# Altium PCB nRF51822.PcbDoc
Units mil, origin at the board's own origin, x right, y up, seen from the top; angles counter-clockwise.
Board outline 1575 x 1405 mil, 2 copper layers (Top Layer, Bottom Layer); 36 components, 48 nets, 160 pads, 68 vias.
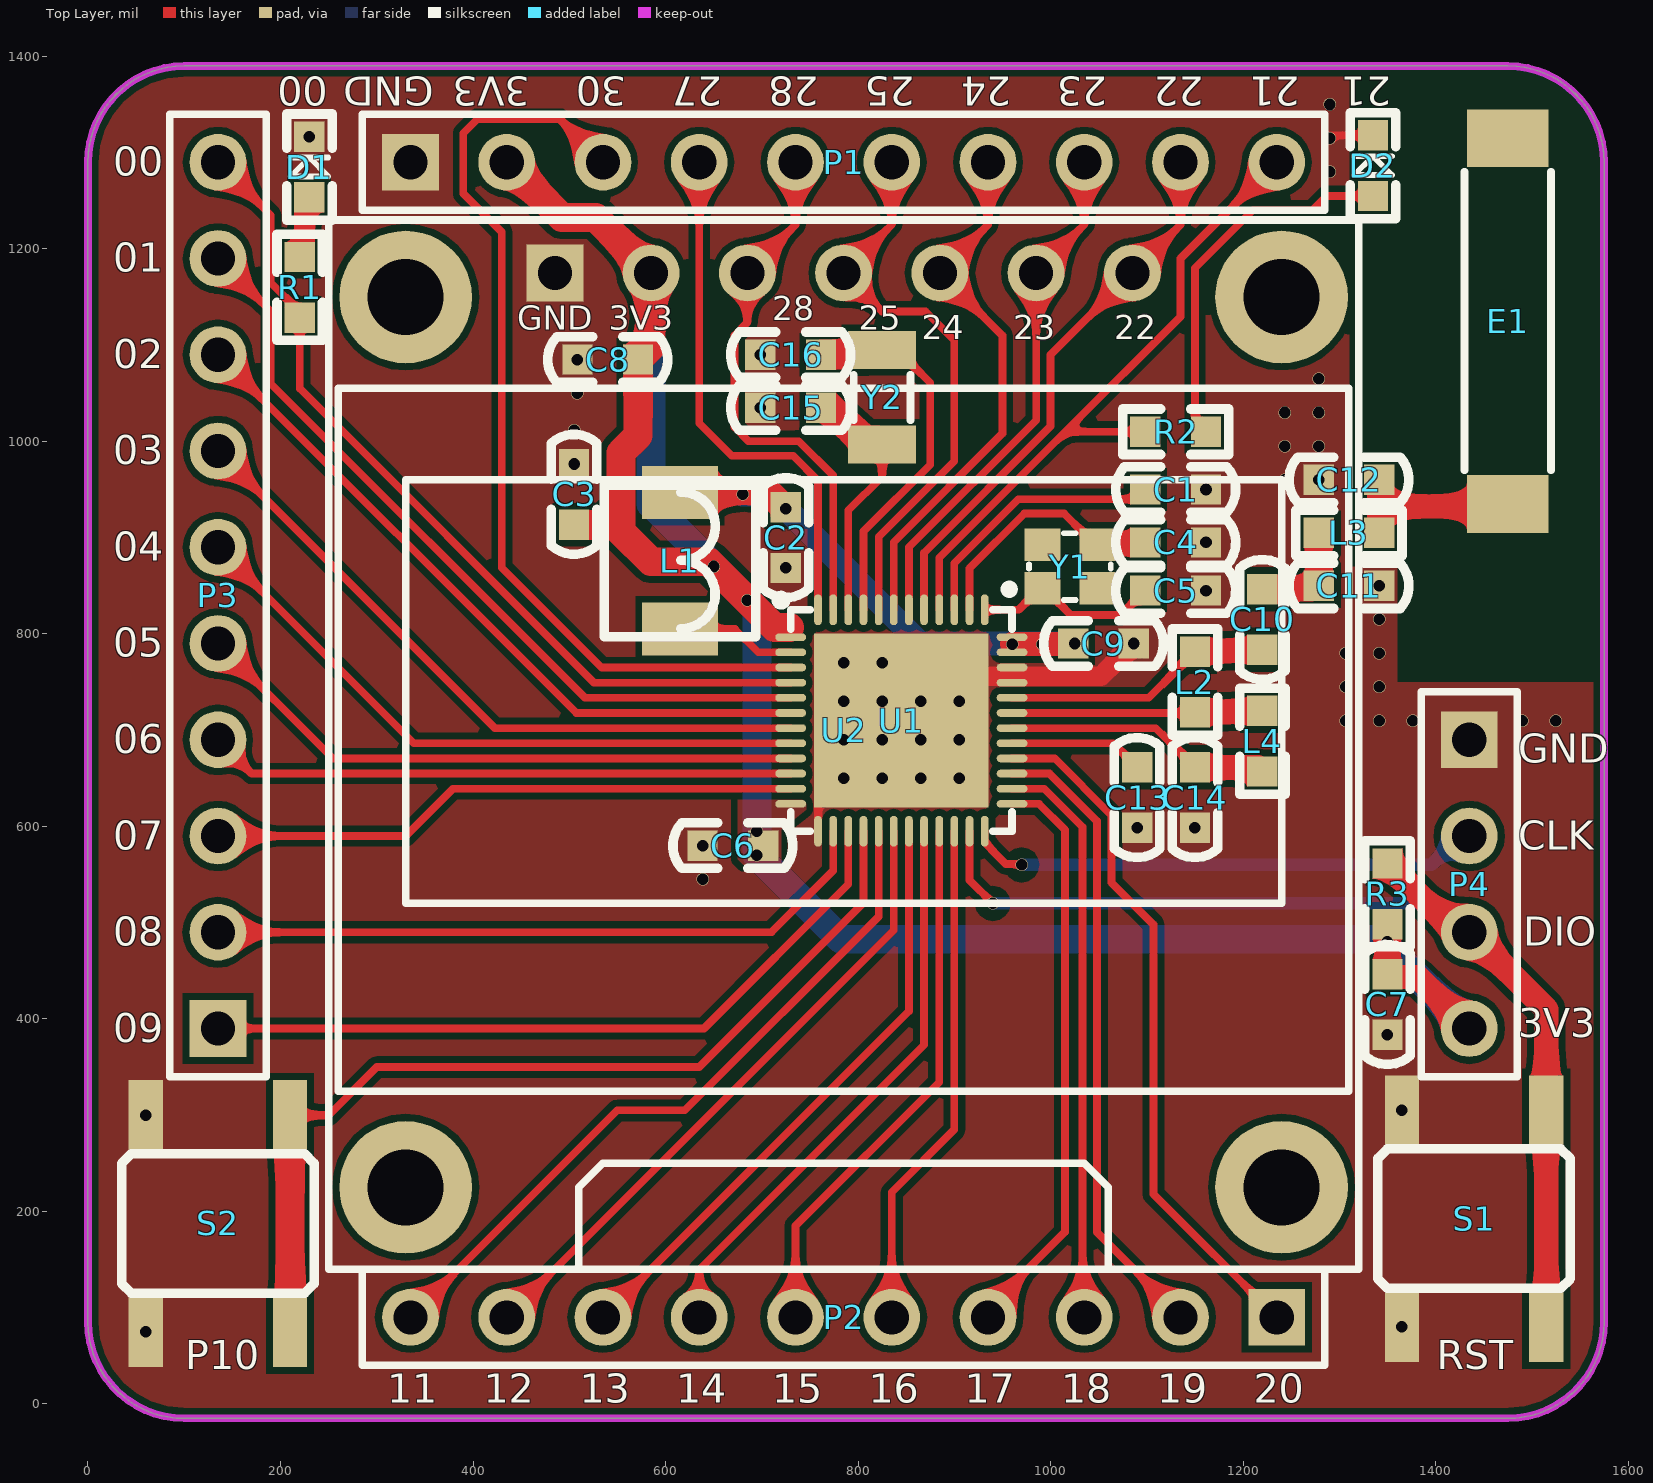
[diagram p0: Top Layer view]
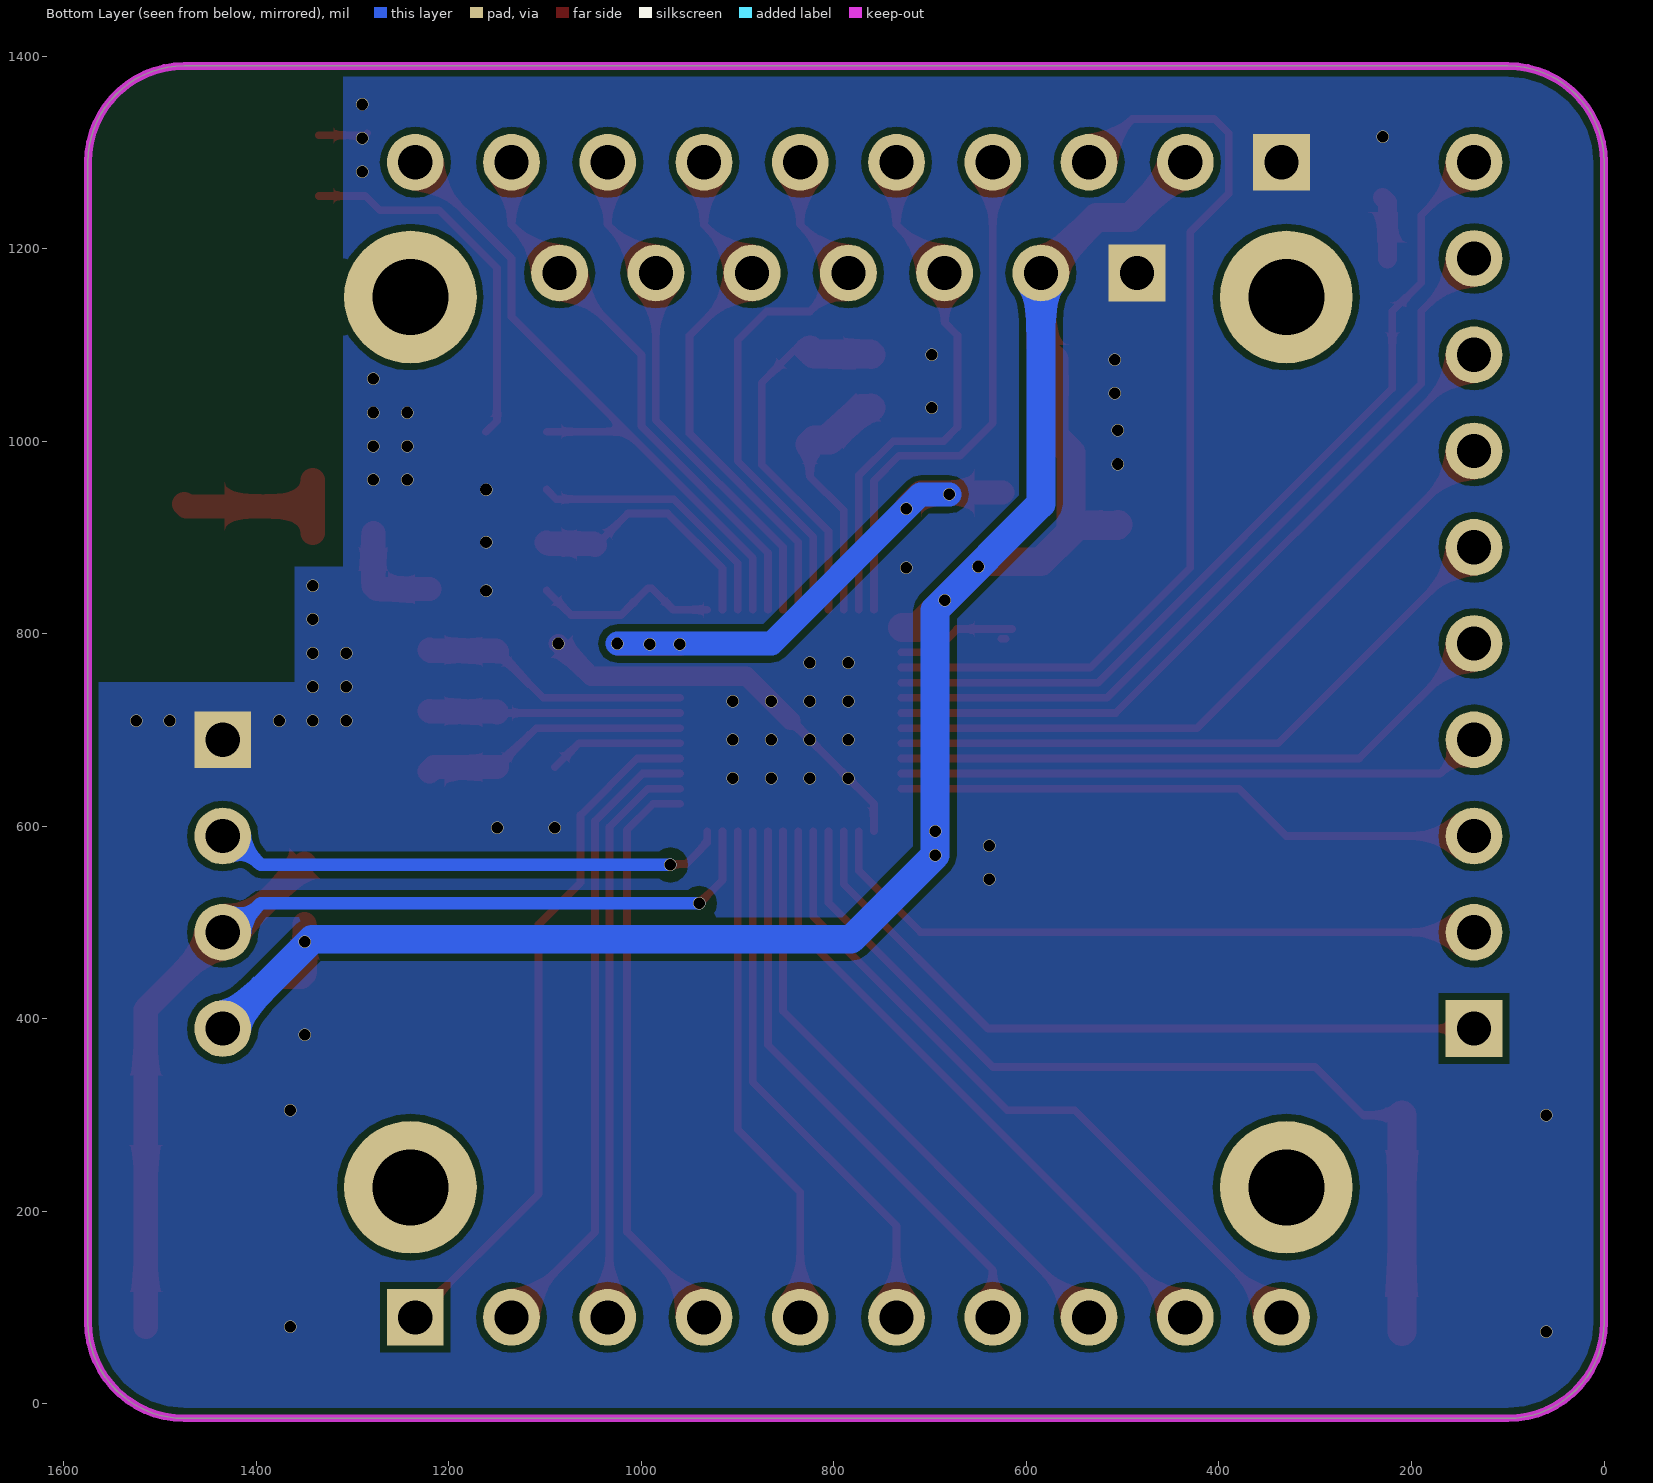
[diagram p1: Bottom Layer view, seen from below]
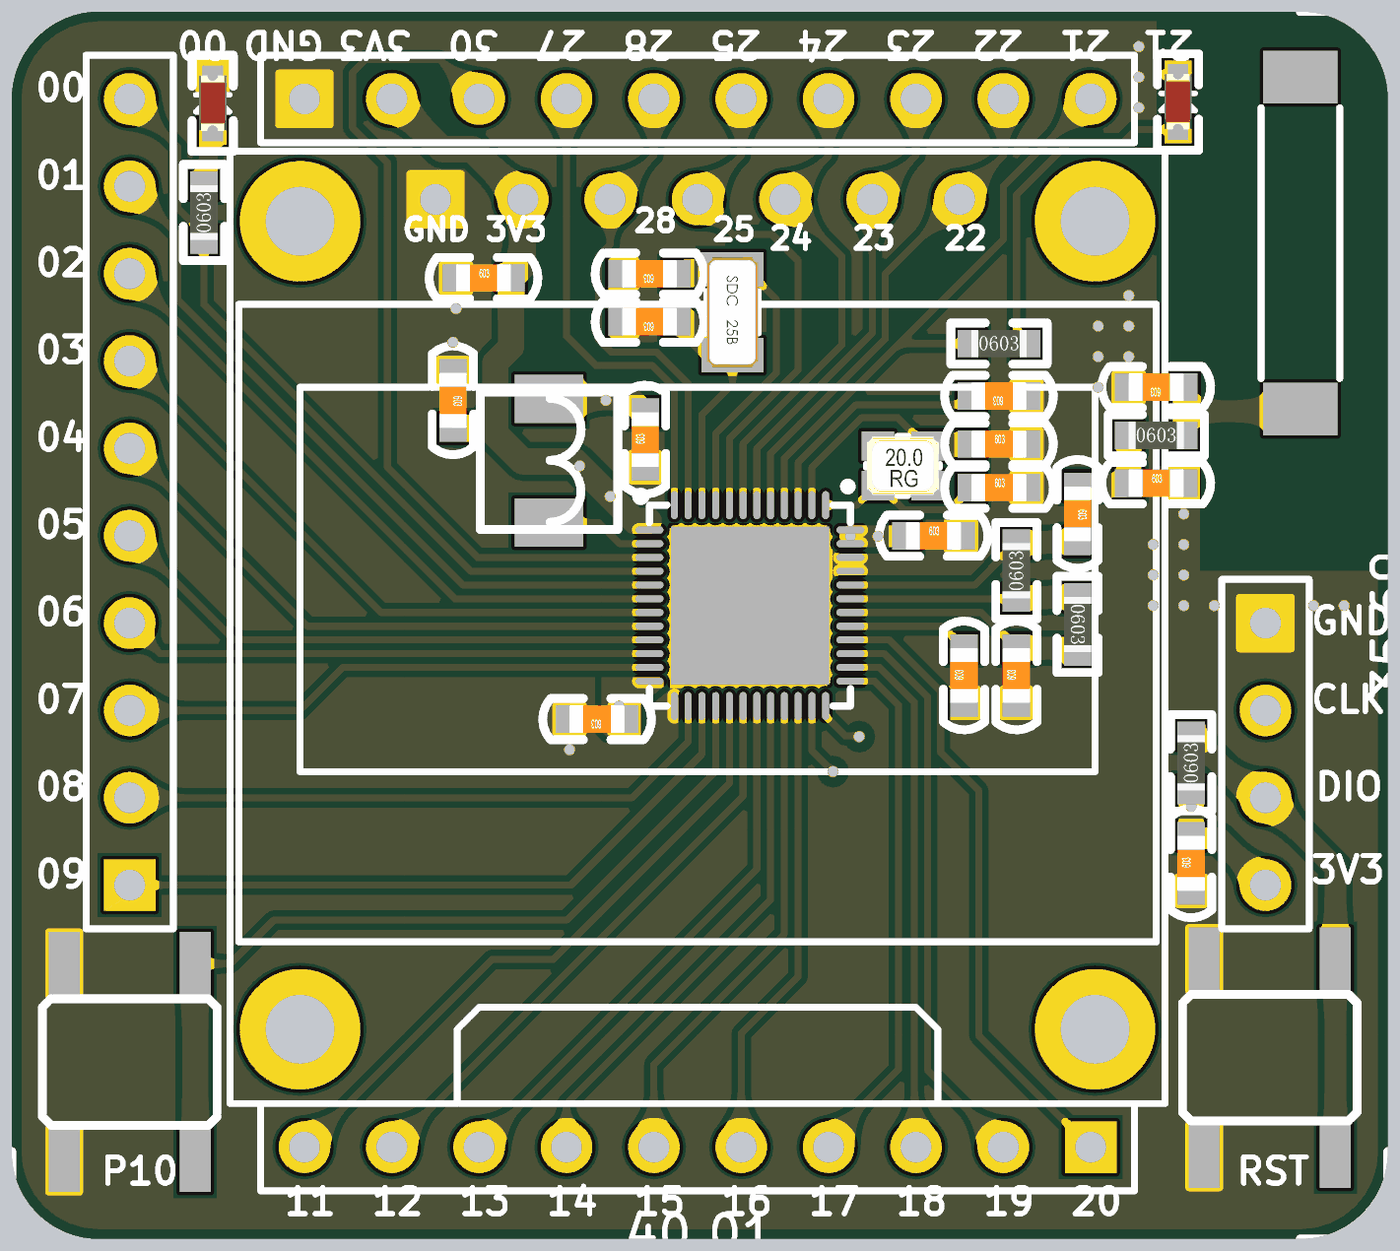
[diagram p2: 3D render of the assembled board from above, using the file's embedded part models]

## Layer stack, top to bottom
Top Solder: solder mask 0.4, Solder Resist, Dk 3.5
Top Layer: signal copper 1.4
Dielectric 1: dielectric 12.6, FR-4, Dk 4.8
Bottom Layer: signal copper 1.4
Bottom Solder: solder mask 0.4, Solder Resist, Dk 3.5

## Board outline
0,85 0,1290 cw(c100,1290) 100,1390 1475,1390 cw(c1475,1290) 1575,1290 1575,85 cw(c1475,85) 1475,-15 100,-15 cw(c100,85)

## Design rules (kind name [scope] priority, off if disabled: settings)
Clearance [All] p1: gap=7
HoleSize [All] p1: absolutevalues=TRUE maxlimit=100 minlimit=12 maxpercent=80.000 minpercent=20.000
HoleToHoleClearance [All] p1: gap=13 allowstackedmicrovias=TRUE
MinimumSolderMaskSliver [All] p1: minsoldermaskwidth=7
PolygonConnect [All] p1: connectstyle=Direct reliefconductorwidth=10 reliefentries=4 polygonreliefangle="90 Angle" airgapwidth=10
RoutingVias [All] p1: holewidth=12 width=13 viastyle="Through Hole" minholewidth=12 minwidth=12 maxholewidth=200 maxwidth=200
SilkToSilkClearance [All] p1: silktosilkclearance=7
SolderMaskExpansion [All] p1: expansion=4
Width [All] p1: maxlimit=100 minlimit=7 preferedwidth=10
26 further rules are at their usual default settings.

## Components (designator, comment, footprint, x,y, rotation, side; value= is the part's Value field where it differs from the comment)
C1 "1uF" 电容_C0603 1130,950 r180 top
C2 "1uF" 电容_C0603 725,900 r90 top
C3 "10uF" 电容_C0603 505,945 r270 top
C4 "12pF" 电容_C0603 1130,895 r0 top
C5 "12pF" 电容_C0603 1130,845 r0 top
C6 "100nF" 电容_C0603 670,580 r180 top
C7 "1uF" 电容_C0603 1350,415 r90 top
C8 "1uF" 电容_C0603 540,1085 r0 top
C9 "1uF" 电容_C0603 1055,790 r0 top
C10 "1uF" 电容_C0603 1220,815 r270 top
C11 "1uF" 电容_C0603 1310,850 r0 top
C12 "1uF" 电容_C0603 1310,960 r180 top
C13 "47nF" 电容_C0603 1090,630 r90 top
C14 "1uF" 电容_C0603 1150,630 r90 top
C15 "12pF" 电容_C0603 730,1035 r180 top
C16 "12pF" 电容_C0603 730,1090 r180 top
D1 "red" LED_0603 230,1285 r90 top
D2 "green" LED_0603 1335,1286.5 r90 top
E1 "Antenna" AN9520 1475,1125 r0 top
L1 "10uH" 变压器电感_0420 615,875.87 r180 top
L2 "10uH" 电阻_R0603 1150,750 r90 top
L3 "10uH" 电阻_R0603 1310,905 r0 top
L4 "10uH" 电阻_R0603 1220,688.5 r270 top
P1 "Header 10" HDR1X10 335,1290 r0 top
P2 "Header 10" HDR1X10 1235,90 r180 top
P3 "Header 10" HDR1X10 135,390 r90 top
P4 "Header 4" HDR1X4 1435,690 r270 top
R1 "Res2" 电阻_R0603 220,1160 r90 top
R2 "Res2" 电阻_R0603 1130,1010 r0 top
R3 "Res2" 电阻_R0603 1350,530 r90 top
S1 "SW-PB" SPST4 1440,190 r180 top
S2 "SW-PB" SPST4 135,185 r180 top
U1 "nRF51822" "QFN48 6X6 mm" 845,710 r0 top
U2 "OLED" "OLED 0.96" 785,1175 r0 top locked
Y1 "XTAL" 晶振_2016 1020,870 r0 top
Y2 "32.768K" 晶振_3215 825,1045.79 r270 top

## Footprints (in the part's own frame and the unit in brackets; to place one, negate y for a bottom-side part, rotate by r counter-clockwise, add the part's x,y. Pads: shape width x height; smd on the part's side, far side on the other; paste and mask are expansions set on the pad)
AN9520 [mil] "Multilayer Chip Antenna for  2.4GHz Wireless Communication"
  rect 85x60 smd: 1(0,-190) 2(0,190)
  silkscreen extent -45,-155 45,155, body extent -40,-180 40,180, height 39
HDR1X4 [mm] "Connector; Header; 4 Position"
  rect 1.5x1.5 hole 0.9: 1(0,0)
  round 1.5 hole 0.9: 2(2.54,0) 3(5.08,0) 4(7.62,0)
  silkscreen extent -1.27,-1.27 8.89,1.27
HDR1X10 [mm] "Connector; Header; 10 Position"
  rect 1.5x1.5 hole 0.9: 1(0,0)
  round 1.5 hole 0.9: 2(2.54,0) 3(5.08,0) 4(7.62,0) 5(10.16,0) 6(12.7,0) 7(15.24,0) 8(17.78,0) 9(20.32,0) 10(22.86,0)
  silkscreen extent -1.27,-1.27 24.13,1.27
LED_0603 [mm]
  rect 0.8x0.8 smd paste-0.1: A(-0.8,0) K(0.8,0)
  silkscreen extent -1.4,-0.6 1.4,0.6, body extent -0.8,-0.4 0.82,0.4, height 0.6
"OLED 0.96" [mm]
  round 3.5 hole 2 unplated: 0(-11.557,-24.13) 0(-11.557,-0.635) 0(11.557,-24.13) 0(11.557,-0.635)
  rect 1.5x1.5 hole 0.9: 1(-7.62,0)
  round 1.5 hole 0.9: 2(-5.08,0) 3(-2.54,0) 4(0,0) 5(2.54,0) 6(5.08,0) 7(7.62,0)
  silkscreen extent -13.59,-26.29 13.59,1.4, body extent -9.53,-1.27 9.53,1.27, height 0.89
"QFN48 6X6 mm" [mil]
  oval 32x8 smd: 1(-115,86.57) 2(-115,70.83) 3(-115,55.09) 4(-115,39.35) 5(-115,23.61) 6(-115,7.87) 7(-115,-7.87) 8(-115,-23.61) 9(-115,-39.35) 10(-115,-55.09) 11(-115,-70.83) 12(-115,-86.57) 25(115,-86.57) 26(115,-70.83) 27(115,-55.09) 28(115,-39.35) 29(115,-23.61) 30(115,-7.87) 31(115,7.87) 32(115,23.61) 33(115,39.35) 34(115,55.09) 35(115,70.83) 36(115,86.57)
  oval 8x32 smd: 13(-86.57,-115) 14(-70.83,-115) 15(-55.09,-115) 16(-39.35,-115) 17(-23.61,-115) 18(-7.87,-115) 19(7.87,-115) 20(23.61,-115) 21(39.35,-115) 22(55.09,-115) 23(70.83,-115) 24(86.57,-115) 37(86.57,115) 38(70.83,115) 39(55.09,115) 40(39.35,115) 41(23.61,115) 42(7.87,115) 43(-7.87,115) 44(-23.61,115) 45(-39.35,115) 46(-55.09,115) 47(-70.83,115) 48(-86.57,115)
  rect 181.1x181.1 smd: 49(0,0)
  silkscreen extent -130,-115 115,130, body extent -115,-115 115,115, height 24
SPST4 [mm] "Switch; 2 Leads"
  rect 0.9x1.85 smd: 1(-1.905,2.794) 1(-1.905,-2.921) 2(1.905,2.794) 2(1.905,-2.921)
  silkscreen extent -2.54,-1.91 2.54,1.78, body extent -2.67,-2.29 2.67,2.16, height 1.75
变压器电感_0420 [mm]
  rect 2x1.4 smd: 1(0,-1.8) 2(0,1.8)
  silkscreen extent -2,-2 2,2
晶振_2016 [mm]
  rect 0.95x0.85 smd: 0(-0.725,0.575) 0(0.725,-0.575) 1(-0.725,-0.575) 2(0.725,0.575)
  silkscreen extent -1.7,-0.88 1.08,0.88, body extent -1.05,-0.85 1.05,0.85, height 0.56
晶振_3215 [mm] "XTAL SMD 3.2 x 1.5 mm"
  rect 1x1.8 smd: 1(-1.25,0) 2(1.25,0)
  silkscreen extent -0.6,-0.75 0.6,0.75, body extent -1.6,-0.75 1.6,0.75, height 0.81
电容_C0603 [mm]
  rect 0.8x0.8 smd: 1(-0.8,0) 2(0.8,0)
  silkscreen extent -1.58,-0.6 1.58,0.6, body extent -0.8,-0.4 0.8,0.4, height 0.3
电阻_R0603 [mm]
  rect 0.8x0.8 smd: 1(-0.8,0) 2(0.8,0)
  silkscreen extent -1.4,-0.6 1.4,0.6, body extent -0.8,-0.4 0.8,0.4, height 0.45

## Part data
C1 C2 C3 C4 C5 C6 C7 C8 C9 C10 C11 C12 C13 C14 C15 C16: library part cap
D1 D2: library part LED
E1: "Generic Antenna"
L1 L2 L3 L4: library part "Inductor Iron 2"
P1 P2 P3: "Header, 10-Pin"
P4: "Header, 4-Pin"
R1 R2 R3: "Resistor"
S1 S2: "Switch"
U1: "Multiprotocol Bluetooth? 4.0 low energy/2.4 GHz RF SoC"
U2: library part OLED_SPI, "1.3寸或0.96寸SPI接口的OLED"
Y2: library part XTAL_A

## Via types
v1: diameter 13/13 (per signal layer), hole 12, Top Layer to Bottom Layer, tented bottom, 39 vias
v2: diameter 13/13 (per signal layer), hole 12, Top Layer to Bottom Layer, tented both sides, 28 vias
v3: diameter 13, hole 12, Top Layer to Bottom Layer, tented both sides, 1 vias

## Nets (pads, with @x,y where several pads share a name; then routed paths per layer and width w, separated by ;. In a path a pad name is that pad's centre, name@x,y a point inside that pad or via, vN(x,y) a via of type N, cw(c..) or ccw(c..) an arc to the next point about the centre after c; other vN are vias at no path point)
+3.3: C3.2 C6.1 C7.2 C8.2 P1.2 P4.4 R3.1 U1.1 U1.12 U2.2 | length 2373
  Top Layer w25: R3.1 C7.2 1353.01,443.48 1381.52,443.48 P4.4
  Top Layer w30: P1.2 492.5,1232.5 527.5,1232.5 U2.2 585,1098.5 C8.2 571.5,1006.09 553.63,988.22 553.63,906.37 ; C3.2 505.75,912.76 547.24,912.76 553.63,906.37 ; 729,806.83 713.17,806.83 645,875 585,875 553.63,906.37
  Bottom Layer w30: U2.2 585,935 695,825 v1(695,595) v1(695,570) 782.22,482.78 1342.22,482.78 P4.4
  other v2: 1350,480 685,835 650,870
AVDD: C2.2 C9.1 L1.1 U1.35 U1.36 | length 578.5
  Top Layer w25: L1.1@625,946.73 709.76,946.73 C2.2 ; v1(960,789.45) v2(991.48,789.45) C9.1@1022.95,789.45
  Bottom Layer w25: v2(680,945) 710,945 v1(725,930) 865,790 v1(1025,790)
GND: C1.1 C2.1 C3.1 C4.2 C5.2 C6.2 C7.1 C8.1 C9.2 C11.2 C12.2 C13.1 C14.1 C15.2 C16.2 D1.K D2.K P1.1 P4.1 S1.2 S2.2 U1.13 U1.33 U1.34 U1.49 U2.1 | length 476.3
  Top Layer w8: U1.13 758.43,623.43 U1.49 ; 1285,1320 1287.01,1317.99 D2.K
  Top Layer w20: U1.49 890.97,755.97 1052.46,755.97 v1(1086.5,790)
  other v1: 60,75 1365,80 60,300 1365,305 1350,383.5 638.5,580 1090,598.5 1150,598.5 785,650 825,650 865,650 905,650 785,690 825,690 865,690 905,690 785,730 825,730 865,730 905,730 785,770 825,770 1161.5,845 1341.5,850 725,868.5 1161.5,895 1161.5,950 1278.5,960 505,976.5 698.5,1035 508.5,1085 698.5,1090 230,1316.5
  other v2: 638.5,545 1306.5,710 1341.5,710 1376.5,710 1490,710 1525,710 1306.5,745 1341.5,745 1306.5,780 1341.5,780 1341.5,815 1243.5,960 1243.5,995 1278.5,995 505,1011.5 1243.5,1030 1278.5,1030 508.5,1050 1278.5,1065 1290,1280 1290,1315 1290,1350
NetC1_2: C1.2 U1.39 | length 278.6
  Top Layer w8: U1.39 900.09,873.48 966.62,940 1088.5,940 C1.2
NetC4_1: C4.1 U1.38 Y1.2 | length 263.7
  Top Layer w8: U1.38 915.83,868 972.83,925 1014.21,925 1046.57,892.64 Y1.2
  Top Layer w25: Y1.2 1049.72,893.82 1097.32,893.82 C4.1
NetC5_1: C5.1 U1.37 Y1.1 | length 198.2
  Top Layer w8: U1.37 967.13,825 989.49,847.36 993.43,847.36 1015,825.79 1021.16,819.63 1073.13,819.63 C5.1
NetC10_1: C10.1 C11.1 L3.1 | length 115
  Top Layer w25: C10.1 1275,846.5 C11.1 L3.1
NetC10_2: C10.2 L2.2 U1.32 | length 280.7
  Top Layer w8: U1.32 1102.11,733.61 L2.2
  Top Layer w25: L2.2 1151,782.5 1219,782.5 C10.2
NetC12_1: C12.1 E1.1 L3.2 | length 189.5
  Top Layer w25: L3.2 1341.5,932.5 ; C12.1 1341.5,932.5 ; E1.1 1472.5,932.5 1341.5,932.5
NetC13_2: C13.2 U1.29 | length 140.3
  Top Layer w8: U1.29 1065.11,686.39 C13.2
NetC14_2: C14.2 L4.2 U1.30 | length 278.7
  Top Layer w8: U1.30 1109.37,702.13 C14.2
  Top Layer w25: C14.2 1215.51,661.5 L4.2
NetC15_1: C15.1 U1.46 Y2.2 | length 265.5
  Top Layer w8: U1.46 789.91,928.37 825,963.46 Y2.2
  Top Layer w30: C15.1 762.24,1034.25 771.57,1034.25 804.57,1001.26 820.31,1001.26 Y2.2
NetC16_1: C16.1 U1.45 Y2.1 | length 394.2
  Top Layer w8: U1.45 805.65,906.55 875,975.9 875,1060.75 840.75,1095 Y2.1
  Top Layer w30: C16.1 762.24,1090.75 820.75,1090.75 Y2.1
NetD1_A: D1.A R1.2 | length 66.2
  Top Layer w20: R1.2@225,1189.38 225,1248.5 D1.A
NetD2_A: D2.A R2.2 | length 390.8
  Top Layer w8: R2.2 1150,1021.5 1150,1180 1210,1240 1272,1240 1287,1255 D2.A
NetL1_2: L1.2 U1.2 | length 129.8
  Top Layer w8: L1.2 672.1,805 696.27,780.83 U1.2 ; L1.2@621.47,795 L1.2@626.21,795
NetL2_1: L2.1 L4.1 U1.31 | length 260.9
  Top Layer w8: U1.31 1149.37,717.87 L2.1
  Top Layer w25: L2.1 1150.75,719.25 1219.25,719.25 L4.1
nRESET: P4.3 R3.2 S1.1 U1.23 | length 1150.2
  Top Layer w8: U1.23 915.83,544.17 v2(940,520)
  Top Layer w25: R3.2 1414.98,496.52 1428.48,496.52 P4.3 1515,410 1515,305 S1.1@1515,80
  Bottom Layer w13: v2(940,520) 1395.66,520 1425.66,490 P4.3
P0.00: P3.10 R1.1 U1.4 | length 906.8
  Top Layer w8: P3.10 190,1235 190,1165 220,1135 220,1055 525.65,749.35 U1.4
P0.01: P3.9 U1.5 | length 828
  Top Layer w8: P3.9 190,1135 190,1060 516.39,733.61 U1.5
P0.02: P3.8 U1.6 | length 749.1
  Top Layer w8: P3.8 507.13,717.87 U1.6
P0.03: P3.7 U1.7 | length 714.2
  Top Layer w8: P3.7 422.87,702.13 U1.7
P0.04: P3.6 U1.8 | length 679.3
  Top Layer w8: P3.6 338.61,686.39 U1.8
P0.05: P3.5 U1.9 | length 644.4
  Top Layer w8: P3.5 254.35,670.65 U1.9
P0.06: P3.4 U1.10 | length 609.5
  Top Layer w8: P3.4 170.09,654.91 U1.10
P0.07: P3.3 U1.11 | length 615.4
  Top Layer w8: P3.3 330,590 379.17,639.17 U1.11
P0.08: P3.2 U1.14 | length 706.6
  Top Layer w8: P3.2 710,490 774.17,554.17 U1.14
P0.09: P3.1 U1.15 | length 772.1
  Top Layer w8: P3.1 640,390 789.91,539.91 U1.15
P0.10: S2.1 U1.16 | length 986.4
  Top Layer w8: S2.1@210,300 250,300 300,350 635,350 805.65,520.65 U1.16
  Top Layer w30: S2.1@210,75 S2.1@210,300
P0.11: P2.10 U1.17 | length 747.5
  Top Layer w8: P2.10 550,305 620,305 821.39,506.39 U1.17
P0.12: P2.9 U1.18 | length 671.6
  Top Layer w8: P2.9 837.13,492.13 U1.18
P0.13: P2.8 U1.19 | length 636.7
  Top Layer w8: P2.8 852.87,407.87 U1.19
P0.14: P2.7 U1.20 | length 601.8
  Top Layer w8: P2.7 635,139.41 868.61,373.02 U1.20
P0.15: P2.6 U1.21 | length 566.9
  Top Layer w8: P2.6 735,185 884.35,334.35 U1.21
P0.16: P2.5 U1.22 | length 532
  Top Layer w8: P2.5 835,220 900.09,285.09 U1.22
P0.17: P2.4 U1.25 | length 605.7
  Top Layer w8: P2.4 935,98.73 1015,178.73 1015,596.36 987.94,623.43 U1.25
P0.18: P2.3 U1.26 | length 599.8
  Top Layer w8: U1.26 993.41,639.17 1033.25,599.32 1033.25,91.75 P2.3
P0.19: P2.2 U1.27 | length 660.2
  Top Layer w8: U1.27 998.88,654.91 1048.25,605.54 1048.25,178.34 1135,91.59 P2.2
P0.20: P2.1 U1.28 | length 720.5
  Top Layer w8: U1.28 1004.35,670.65 1063.25,611.75 1063.25,541.75 1106.91,498.09 1106.91,218.09 P2.1
P0.21: P1.10 R2.1 U1.40 | length 693.3
  Top Layer w8: U1.40 884.35,878.95 1015.4,1010 ; R2.1 1015.4,1010 ; P1.10 1135,1190 1135,1129.6 1015.4,1010
P0.22: P1.9 U1.41 U2.7 | length 575.3
  Top Layer w8: U1.41 868.61,884.42 1000,1015.81 1000,1090 U2.7 1135,1225 P1.9
P0.23: P1.8 U1.42 U2.6 | length 540.4
  Top Layer w8: U1.42 852.87,889.89 985,1022.02 U2.6 1035,1225 P1.8
P0.24: P1.7 U1.43 U2.5 | length 559.4
  Top Layer w8: U1.43 837.13,895.37 950,1008.24 950,1110 U2.5 935,1225 P1.7
P0.25: P1.6 U1.44 U2.4 | length 592.3
  Top Layer w8: U1.44 821.39,900.84 900,979.45 900,1105 870,1135 825,1135 822.66,1137.34 U2.4 835,1225 P1.6
P0.28: P1.5 U1.47 U2.3 | length 564.2
  Top Layer w8: P1.5 735,1225 U2.3 685,1123.55 671.76,1110.3 671.76,1014.7 686.21,1000.24 738.5,1000.24 774.17,964.58 U1.47
P0.29: P1.4 U1.48 | length 553.5
  Top Layer w8: P1.4 635,1018.79 668.79,985 732.53,985 758.43,959.1 U1.48
P0.30: P1.3 U1.3 | length 980.7
  Top Layer w8: P1.3 490,1335 405,1335 390,1320 390,1257.5 430,1217.5 430,868.64 533.64,765 666.45,765 666.55,765.09 U1.3
SWDCLK: P4.2 U1.24 | length 537.4
  Top Layer w8: U1.24 931.57,583 953.62,560.96 969.04,560.96 v3(970,560)
  Bottom Layer w13: v3(970,560) 1395.66,560 1425.66,590 P4.2
pads on no net: E1.2 U2.0 Y1.0

## Polygon pours and split planes (outlines as drawn)
+3.3 on Top Layer "+3.3_L01_P002" (solid, pour order 2): 746.29,630 746.29,617.19 720,596.37 720,560 680.67,560 675,565.67 675,630
GND on Top Layer "GND_L01_P003" (solid, remove dead copper, pour order 3): 0,1390 0,-15 1575,-15 1575,1390
GND on Bottom Layer "GND_L02_P001" (solid, remove dead copper, pour order 1): 1575,1390 1575,-15 0,-15 0,1390

## Keep-outs
Keep-Out Layer:
  the board outline again, w8

## Other copper
Top Layer:
  pour cut-out: 1310,1375
  pour cut-out: 1310,1375
  pour cut-out: 1310.46,1390 1310.46,870 1360,870 1360,750 1575,750 1575,1390
Bottom Layer:
  pour cut-out: 1310,1390 1310,870 1360,870 1360,750 1575,750 1575,1390

## Silkscreen, mask and mechanical layers (free items; w line width, h text height)
Top Overlay:
  text "00" at 249,1379 h30 r180
  text "GND" at 359,1379 h30 r180
  text "3V3" at 459,1379 h30 r180
  text "30" at 559,1379 h30 r180
  text "27" at 659,1379 h30 r180
  text "28" at 759,1379 h30 r180
  text "25" at 859,1379 h30 r180
  text "24" at 959,1379 h30 r180
  text "23" at 1059,1379 h30 r180
  text "22" at 1159,1379 h30 r180
  text "21" at 1259,1379 h30 r180
  text "21" at 1354,1379 h30 r180
  text "00" at 26,1276 h30
  text "01" at 26,1176 h30
  text "28" at 711,1126 h25
  text "GND" at 446,1116 h25
  text "3V3" at 541,1116 h25
  text "25" at 801,1116 h25
  text "24" at 866,1106 h25
  text "23" at 961,1106 h25
  text "22" at 1066,1106 h25
  text "02" at 26,1076 h30
  text "03" at 26,976 h30
  text "04" at 26,876 h30
  text "05" at 26,776 h30
  text "06" at 26,676 h30
  text "GND" at 1486,666 h30
  text "07" at 26,576 h30
  text "CLK" at 1486,576 h30
  text "08" at 26,476 h30
  text "DIO" at 1491,476 h30
  text "3V3" at 1486,381 h30
  text "09" at 26,376 h30
  text "P10" at 101,36 h30
  text "RST" at 1401,36 h30
  text "11" at 311,1 h30
  text "12" at 411,1 h30
  text "13" at 511,1 h30
  text "14" at 611,1 h30
  text "15" at 711,1 h30
  text "16" at 811,1 h30
  text "17" at 911,1 h30
  text "18" at 1011,1 h30
  text "19" at 1111,1 h30
  text "20" at 1211,1 h30

## Dimensions
0,85 to 1575,85 on Top Overlay
1475,-15 to 1475,1390 on Top Overlay